# Altium PCB PCB1.PcbDoc
Units mm, origin at the board's own origin, x right, y up, seen from the top; angles counter-clockwise.
Board outline 85.6 x 53.98 mm, 2 copper layers (Top Layer, Bottom Layer); 37 components, 37 nets, 137 pads, 19 vias.
Unrouted connection lines stored in the file: 14.
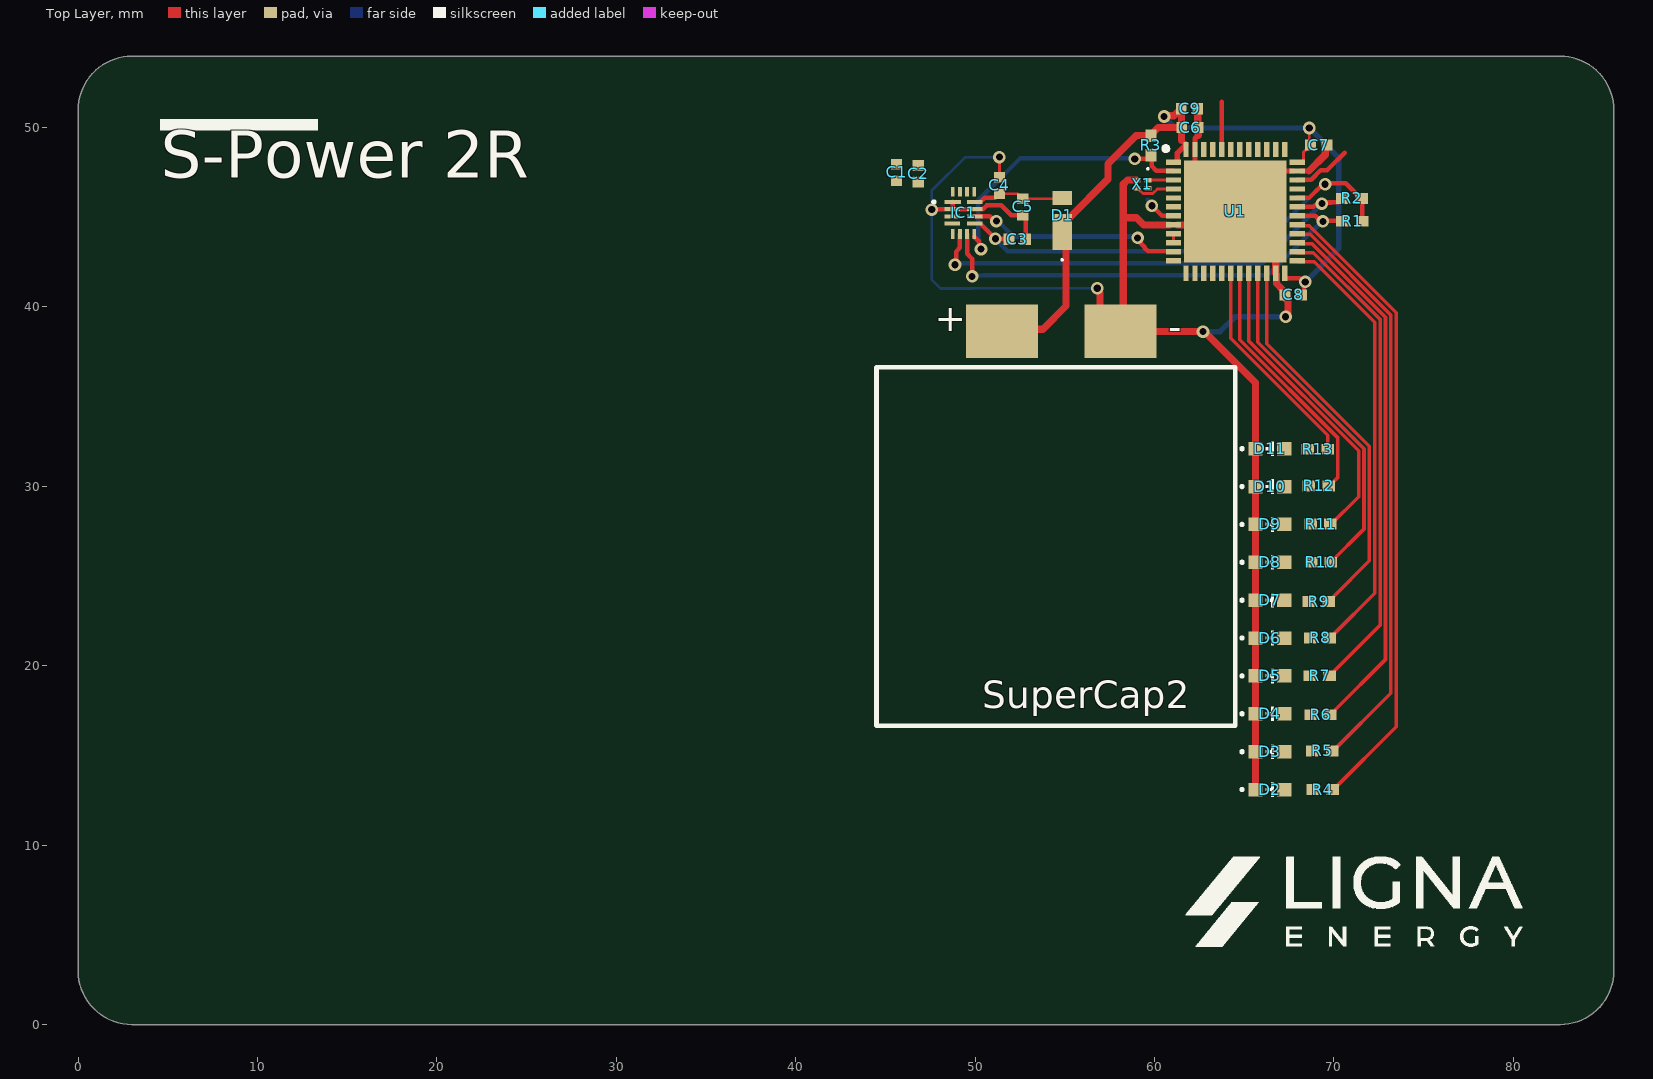
[diagram p0: Top Layer view]
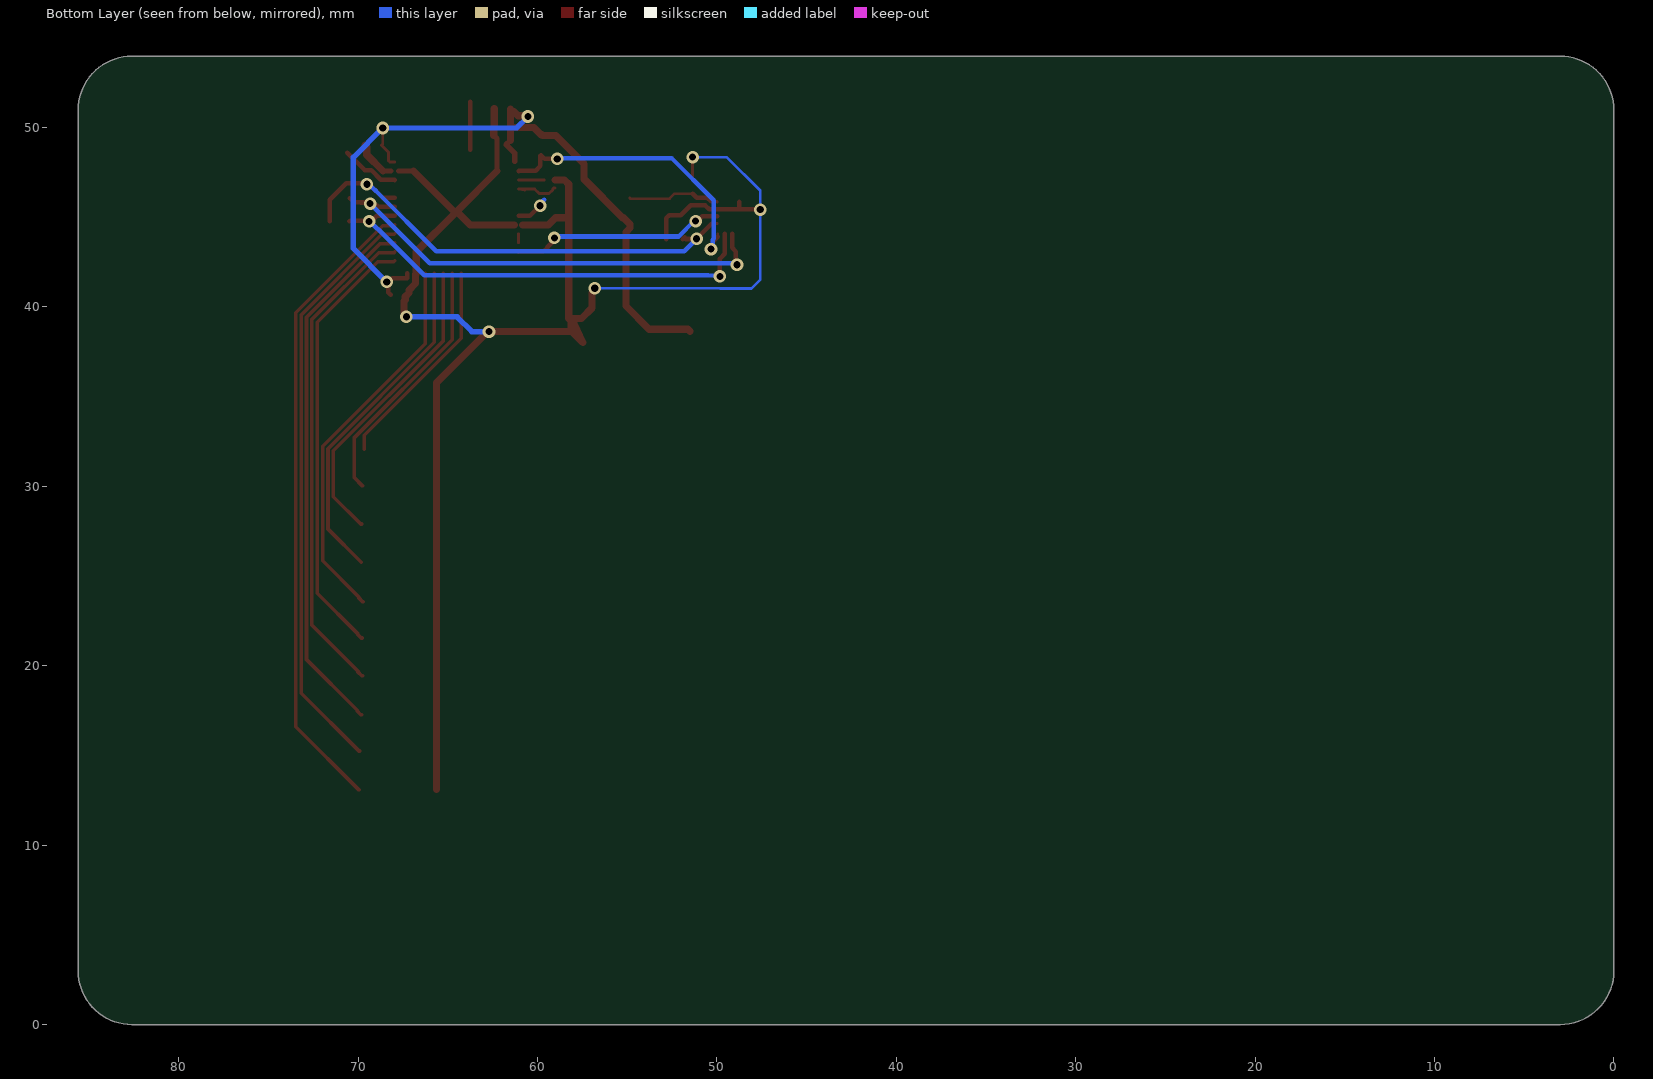
[diagram p1: Bottom Layer view, seen from below]

## Layer stack, top to bottom
Top Solder: solder mask 0.0102, Solder Resist, Dk 3.5
Top Layer: signal copper 0.0356
Dielectric 1: dielectric 0.32, FR-4, Dk 4.8
Bottom Layer: signal copper 0.0356
Bottom Solder: solder mask 0.0102, Solder Resist, Dk 3.5

## Board outline
0,3 0,50.98 cw(c3,50.98) 3,53.98 82.6,53.98 cw(c82.6,50.98) 85.6,50.98 85.6,3 cw(c82.6,3) 82.6,0 3,0 cw(c3,3)

## Design rules (kind name [scope] priority, off if disabled: settings)
Clearance [All] p1: gap=0.254 ignorepadtopadclearanceinfootprint=FALSE except(0: Arc-Hole Track-Hole SMDPad-Hole THPad-Hole Via-Hole Fill-Hole Poly-Hole Region-Hole Text-Hole; 0.1: Arc-Arc Arc-Track Arc-SMDPad Track-Track Track-SMDPad)
PolygonConnect [All] p1: connectstyle=Relief reliefconductorwidth=0.254 reliefentries=4 polygonreliefangle="90 Angle" airgapwidth=0.254
RoutingVias [All] p1: holewidth=0.711 width=1.27 viastyle="Through Hole" minholewidth=0.4 minwidth=0.7 maxholewidth=0.711 maxwidth=1.27
SolderMaskExpansion [All] p1: expansion=0.102 istentingtop=FALSE
Width [All] p1: maxlimit=0.4 minlimit=0.1 preferedwidth=0.254
30 further rules are at their usual default settings.

## Classes and differential pairs
component class Sheet1: C3 C4 C5 C6 C7 C8 C9 D1 D2 D3 D4 D5 D6 D7 D8 D9 D10 D11 IC1 R1 R2 R3 R4 R5 R6 R7 R8 R9 R10 R11 R12 R13 SuperCap2 U1 X1

## Components (designator, comment, footprint, x,y, rotation, side; value= is the part's Value field where it differs from the comment)
C1 "GRM155C81C474KE01D" CAPC1005X70N 45.625,47.5 r90 top value=0F
C2 "GRM155C81C474KE01D" CAPC1005X70N 46.825,47.425 r90 top value=0F
C3 "GRM155R61E105KA12D" CAPC1005X55N 52.35,43.775 r0 top value=1µF
C4 "C0402C101KCGACAUTO" CAPC1005X70N 51.35,46.775 r270 top
C5 "C0402C101KCMBASJ105SB7474KFNA01GACAUTO" CAPC1005X70N 52.65,45.575 r90 top
C6 "C0402C475K8PACTU" CAPC1005X70N 61.975,50 r0 top
C7 "MLAST105SB5104KFNA01" CAPC1005X70N 69.15,49.025 r0 top
C8 "MLAST105SB5104KFNA01" CAPC1005X70N 67.725,40.675 r180 top
C9 "MLAST105SB5104KFNA01" CAPC1005X70N 61.95,51.05 r0 top
D1 "RBE01VYM6AFHTR" RBE01VYM6AFHTR 54.85,44.825 r0 top
D2 "150060RS55040" WL-SMCD_0603 1336.425,1283.1 r0 top
D3 "150060RS55040" WL-SMCD_0603 1336.425,1285.211 r0 top
D4 "150060AS55040" WL-SMCD_0603 1336.425,1287.322 r0 top
D5 "150060AS55040" WL-SMCD_0603 1336.425,1289.433 r0 top
D6 "150060AS55040" WL-SMCD_0603 1336.425,1291.544 r0 top
D7 "150060VS55040" WL-SMCD_0603 1336.425,1293.656 r0 top
D8 "150060VS55040" WL-SMCD_0603 1336.425,1295.767 r0 top
D9 "150060VS55040" WL-SMCD_0603 1336.425,1297.878 r0 top
D10 "150060VS55040" WL-SMCD_0603 1336.425,1299.989 r0 top
D11 "150060BS55040" WL-SMCD_0603 1336.425,1302.1 r0 top
IC1 "NTP53321G0JHKZ" NTP53321G0JHKZ 49.35,45.25 r0 top
R1 "CRCW04024K70FKEDHP" RESC1005X40N 71.025,44.775 r0 top
R2 "CRCW04024K70FKEDHP" RESC1005X40N 71,46.05 r0 top
R3 "CRCW04024K70FKEDHP" RESC1005X40N 59.8,49 r90 top
R4 "SFR01MZPJ470" RESC1005X40N 69.375,13.1 r0 top
R5 "SFR01MZPJ470" RESC1005X40N 69.35,15.25 r0 top
R6 "SFR01MZPJ470" RESC1005X40N 69.25,17.275 r180 top
R7 "SFR01MZPJ470" RESC1005X40N 69.2,19.45 r180 top
R8 "SFR01MZPJ470" RESC1005X40N 69.225,21.55 r180 top
R9 "SFR01MZPJ470" RESC1005X40N 69.15,23.575 r180 top
R10 "SFR01MZPJ470" RESC1005X40N 69.275,25.775 r180 top
R11 "SFR01MZPJ470" RESC1005X40N 69.25,27.9 r180 top
R12 "SFR01MZPJ470" RESC1005X40N 69.15,30.025 r180 top
R13 "SFR01MZPJ470" RESC1005X40N 69.1,32.075 r180 top
SuperCap2 "S-Power 2R" "S-Power 2R" 54.5,36.65 r0 top
U1 "STM32L431CCU6" QFN50P700X700X60-49N-D 64.5,45.325 r0 top
X1 "WMRAG32K76CS2C00R0" WMRAG32K76CS2C00R0 59.325,46.85 r180 top

## Footprints (in the part's own frame and the unit in brackets; to place one, negate y for a bottom-side part, rotate by r counter-clockwise, add the part's x,y. Pads: shape width x height; smd on the part's side, far side on the other; paste and mask are expansions set on the pad)
CAPC1005X55N [mm]
  rect 0.6x0.62 smd: 1(-0.46,0) 2(0.46,0)
  body extent -0.5,-0.25 0.5,0.25, height 0.25
CAPC1005X70N [mm]
  rect 0.6x0.62 smd: 1(-0.46,0) 2(0.46,0)
  body extent -0.5,-0.25 0.5,0.25, height 0.5
NTP53321G0JHKZ [mm]
  rect 0.9x0.22 smd: 1(-0.6,0.6)
  rect 0.85x0.22 smd: 2(-0.625,0.2) 3(-0.625,-0.2) 4(-0.625,-0.6) 9(0.625,-0.6) 10(0.625,-0.2) 11(0.625,0.2) 12(0.625,0.6)
  rect 0.22x0.55 smd: 5(-0.6,-1.175) 6(-0.2,-1.175) 7(0.2,-1.175) 8(0.6,-1.175) 13(0.6,1.175) 14(0.2,1.175) 15(-0.2,1.175) 16(-0.6,1.175)
  silkscreen extent -1.7,0.55 -1.6,0.65, body extent -0.9,-1.3 0.9,1.3, height 0.6
QFN50P700X700X60-49N-D [mm]
  rect 0.85x0.3 smd: 1(-3.45,2.75) 2(-3.45,2.25) 3(-3.45,1.75) 4(-3.45,1.25) 5(-3.45,0.75) 6(-3.45,0.25) 7(-3.45,-0.25) 8(-3.45,-0.75) 9(-3.45,-1.25) 10(-3.45,-1.75) 11(-3.45,-2.25) 12(-3.45,-2.75) 25(3.45,-2.75) 26(3.45,-2.25) 27(3.45,-1.75) 28(3.45,-1.25) 29(3.45,-0.75) 30(3.45,-0.25) 31(3.45,0.25) 32(3.45,0.75) 33(3.45,1.25) 34(3.45,1.75) 35(3.45,2.25) 36(3.45,2.75)
  rect 0.3x0.85 smd: 13(-2.75,-3.45) 14(-2.25,-3.45) 15(-1.75,-3.45) 16(-1.25,-3.45) 17(-0.75,-3.45) 18(-0.25,-3.45) 19(0.25,-3.45) 20(0.75,-3.45) 21(1.25,-3.45) 22(1.75,-3.45) 23(2.25,-3.45) 24(2.75,-3.45) 37(2.75,3.45) 38(2.25,3.45) 39(1.75,3.45) 40(1.25,3.45) 41(0.75,3.45) 42(0.25,3.45) 43(-0.25,3.45) 44(-0.75,3.45) 45(-1.25,3.45) 46(-1.75,3.45) 47(-2.25,3.45) 48(-2.75,3.45)
  rect 5.7x5.7 smd: 49(0,0)
  silkscreen extent -4,3.38 -3.75,3.62, body extent -3.55,-3.55 3.55,3.55, height 0.6
RBE01VYM6AFHTR [mm]
  rect 1.1x2 smd: 1(0,-0.65)
  rect 1.1x0.8 smd: 2(0,1.25)
  silkscreen extent -0.05,-2.25 0.05,-2.15, body extent -0.7,-1.25 0.7,1.25, height 0.8
RESC1005X40N [mm]
  rect 0.7x0.6 smd: 1(-0.55,0) 2(0.55,0)
  body extent -0.5,-0.25 0.5,0.25, height 0.4
"S-Power 2R" [mm]
  rect 4x3 smd: 1(-3,2) 2(3.6,2)
  silkscreen extent -10,-20 10,0
WL-SMCD_0603 [mm] "SMD Mono-color Chip LED, body 1.6x0.8mm"
  rect 0.8x0.75 smd: 1(-1270.8,-1270) 2(-1269.2,-1270)
  silkscreen extent -1271.62,-1270.4 -1269.78,-1269.6, body extent -1270.8,-1270.4 -1269.2,-1269.6, height 0.42
WMRAG32K76CS2C00R0 [mm]
  rect 0.4x0.25 smd: 1(-0.3,-0.225) 2(0.3,-0.225) 3(0.3,0.225) 4(-0.3,0.225)
  silkscreen extent -0.35,-0.9 -0.25,-0.8, body extent -0.48,-0.33 0.48,0.33, height 0.45

## Part data
C1 C2: library part CMP-001-00140-1, "Multilayer Ceramic Capacitors MLCC - SMD/SMT", Manufacturer_Name="Murata Electronics", Mouser Part Number=81-GRM155C81C474KE1D, Datasheet Link=https://search.murata.co.jp/Ceramy/image/img/A01X/G101/ENG/GRM155C81C474KE01-01A.pdf, Design Item ID=GRM155C81C474KE01D, Height=0.7mm, Manufacturer_Part_Number=GRM155C81C474KE01D, Mouser Price/Stock=https://www.mouser.com/Search/Refine.aspx?Keyword=81-GRM155C81C474KE1D, Source=SamacSys.SchLib
C3: library part CMP-001-00126-1, "Capacitor", Manufacturer_Name="Murata Electronics", Mouser Part Number=81-GRM155R61E105KA2D, Rated Voltage="25 VDC", Arrow Part Number=GRM155R61E105KA12D, Arrow Price/Stock=https://www.arrow.com/en/products/grm155r61e105ka12d/murata-manufacturing?region=nac, Datasheet Link=https://search.murata.co.jp/Ceramy/image/img/A01X/G101/ENG/GRM155R61E105KA12-01A.pdf, Design Item ID=GRM155R61E105KA12D, Height=0.55mm, Manufacturer_Part_Number=GRM155R61E105KA12D, Mouser Price/Stock=https://www.mouser.co.uk/ProductDetail/Murata-Electronics/GRM155R61E105KA12D?qs=hiffU4J9V6bE4a81t2Mv5A%3D%3D, Source=SamacSys.SchLib
C4: library part "Generic capacitor", "Multilayer Ceramic Capacitors MLCC - SMD/SMT 500V 0.0001uF C0G 0402 10% AEC-Q200", Capacitance=100pF, ComponentLink1Description="New link", ComponentLink1URL=https://www.mouser.se/ProductDetail/KEMET/C0402C101KCGACAUTO?qs=1Kr7Jg1SGW8kQysZZQPmCw%3D%3D
C5: library part "Generic capacitor", "Multilayer Ceramic Capacitors MLCC - SMD/SMT 500V 0.0001uF C0G 0402 10% AEC-Q200", Capacitance=0.47uF, ComponentLink1Description="New link", ComponentLink1URL=https://www.mouser.se/ProductDetail/TAIYO-YUDEN/MBASJ105SB7474KFNA01?qs=tlsG%2FOw5FFh70%252Bw5vm%252Bxgg%3D%3D
C6: library part "Generic capacitor", "Multilayer Ceramic Capacitors MLCC - SMD/SMT", Capacitance=4.7uF, ComponentLink1Description="New link", ComponentLink1URL=https://www.mouser.se/ProductDetail/TAIYO-YUDEN/MLASJ105BB5475MFNA01?qs=sGAEpiMZZMsh%252B1woXyUXj3XUfju0vRpjpyIV14TsoXE%3D
C7 C8 C9: library part "Generic capacitor", "Multilayer Ceramic Capacitors MLCC - SMD/SMT 25V 0.1uF X5R 0402 10% Medical", Capacitance=100nF, ComponentLink1Description="New link", ComponentLink1URL=https://www.mouser.se/ProductDetail/TAIYO-YUDEN/MLAST105SB5104KFNA01?qs=sGAEpiMZZMsh%252B1woXyUXj3XUfju0vRpjIEu19pL458I%3D
D1: library part CMP-004-00062-1, "DIODE SCHOTTKY 6V 100MA TUMD2M", Manufacturer_Name="ROHM Semiconductor", Mouser Part Number=755-RBE01VYM6AFHTR, Datasheet Link=https://www.digikey.ph/en/products/detail/rohm-semiconductor/RBE01VYM6AFHTR/24634517, Design Item ID=RBE01VYM6AFHTR, Height=0.8mm, Manufacturer_Part_Number=RBE01VYM6AFHTR, Mouser Price/Stock=https://www.mouser.co.uk/ProductDetail/ROHM-Semiconductor/RBE01VYM6AFHTR?qs=VVKQmw408U8czvswzPLZtQ%3D%3D, Source=SamacSys.SchLib
D2 D3: library part CMP-207942-000007-3, "LED RED DIFFUSED 0603 SMD", Case/Package=0603, Color=Red, Forward Current=40mA, Forward Voltage=2V, Max Junction Temperature (Tj)=115°C, Max Operating Temperature=85°C, Max Reverse Voltage (DC)=5V, Min Operating Temperature=-40°C, Power Dissipation=48mW, Dominant Wavelength=624nm, Height=400µm, Length=1.6mm, Luminous Intensity=90mcd, NexarPartId=90235565, Packaging="Tape and Reel", Peak Wavelength=632nm, Reverse Voltage=5V, RoHS=Compliant, Viewing Angle=140°, Wavelength=624nm, Width=800µm
D4 D5 D6: library part CMP-03913-134708025-1, "150060AS55040 WL-SMCD SMT Mono-color Chip LED Diffused", Forward Current=40mA, Forward Voltage=2V, Max Operating Temperature=85°C, Max Reverse Voltage (DC)=5V, Min Operating Temperature=-40°C, Dominant Wavelength=605nm, Luminous Intensity=110mcd, NexarPartId=134708025, Peak Wavelength=609nm, Viewing Angle=140°
D7 D8 D9 D10: library part CMP-03913-90235568-2, "150060VS55040 WL-SMCD SMT Mono-color Chip LED Diffused", Case/Package=0603, Color=Green, Forward Current=40mA, Forward Voltage=2V, Max Junction Temperature (Tj)=115°C, Max Operating Temperature=85°C, Max Reverse Voltage (DC)=5V, Min Operating Temperature=-40°C, Power Dissipation=48mW, Dominant Wavelength=573nm, Height=400µm, Length=1.6mm, Luminous Intensity=60mcd, NexarPartId=90235568, Packaging="Tape and Reel", Peak Wavelength=575nm, Reverse Voltage=5V, RoHS=Compliant, Viewing Angle=140°, Wavelength=573nm, Width=800µm
D11: library part CMP-03913-90235561-2, "150060BS55040 WL-SMCD SMT Mono-color Chip LED Diffused", Forward Current=60mA, Forward Voltage=3.2V, Max Operating Temperature=85°C, Max Reverse Voltage (DC)=5V, Min Operating Temperature=-40°C, Dominant Wavelength=470nm, Height=400µm, Length=1.6mm, Luminous Intensity=80mcd, NexarPartId=90235561, Packaging="Tape and Reel", Peak Wavelength=465nm, RoHS=Compliant, Viewing Angle=140°, Wavelength=470nm, Width=800µm
IC1: library part CMP-031-00011-1, "Interface - Specialized NTAG", Manufacturer_Name=NXP, Mouser Part Number=771-NTP53321G0JHKZ, Arrow Part Number=NTP53321G0JHKZ, Arrow Price/Stock=https://www.arrow.com/en/products/ntp53321g0jhkz/nxp-semiconductors?region=nac, Datasheet Link=https://www.nxp.com/docs/en/data-sheet/NTP53x2.pdf, Design Item ID=NTP53321G0JHKZ, Height=0.5mm, Manufacturer_Part_Number=NTP53321G0JHKZ, Mouser Price/Stock=https://www.mouser.co.uk/ProductDetail/NXP-Semiconductors/NTP53321G0JHKZ?qs=u16ybLDytRYy2Rt%2Fib73Dw%3D%3D, Source=SamacSys.SchLib
R1 R2 R3: library part CMP-009-00230-1, "CRCW Power Resistor 0402 0.063W 4K7 Vishay CRCW Series Thick Film Power Resistor 0402 Case 4.7k +/-1% 0.125W +/-100ppm/K", Manufacturer_Name=Vishay, Mouser Part Number=71-CRCW04024K70FKEDH, Resistance=4.7k, Arrow Part Number=CRCW04024K70FKEDHP, Arrow Price/Stock=https://www.arrow.com/en/products/crcw04024k70fkedhp/vishay?utm_currency=USD&region=nac, Datasheet Link=http://www.vishay.com/docs/20035/dcrcwe3.pdf, Design Item ID=CRCW04024K70FKEDHP, Height=0.4mm, Manufacturer_Part_Number=CRCW04024K70FKEDHP, Mouser Price/Stock=https://www.mouser.co.uk/ProductDetail/Vishay-Dale/CRCW04024K70FKEDHP?qs=k2%2FDWSARqgH3ASlI4vM3KQ%3D%3D, Source=SamacSys.SchLib
R4 R5 R6 R7 R8 R9 R10 R11 R12 R13: library part "Generic resistor", "Thick Film Resistors Sulfur Tolerant Chip Resistors 0402 case size", Resistance=47, ComponentLink1Description="New link", ComponentLink1URL=https://www.mouser.se/ProductDetail/ROHM-Semiconductor/SFR01MZPJ470?qs=sGAEpiMZZMvdGkrng054t2cqbZCzJY7NKh3gUwXOa5kuN5TNJ%252Bi2TA%3D%3D
SuperCap2: library part CMP-111-000001-1, Design Item ID="S-Power 2R", Source=Schlib.SchLib
U1: library part CMP-031-00018-1, "ARM Microcontrollers - MCU 16/32-BITS MICROS", Manufacturer_Name=STMicroelectronics, Mouser Part Number=511-STM32L431CCU6, Arrow Part Number=STM32L431CCU6, Arrow Price/Stock=https://www.arrow.com/en/products/stm32l431ccu6/stmicroelectronics?region=nac, Datasheet Link=http://www.st.com/content/ccc/resource/technical/document/datasheet/group3/83/b3/60/f6/b1/cc/47/7e/DM00257211/files/DM00257211.pdf/jcr:content/translations/en.DM00257211.pdf, Design Item ID=STM32L431CCU6, Height=0.6mm, Manufacturer_Part_Number=STM32L431CCU6, Mouser Price/Stock=https://www.mouser.co.uk/ProductDetail/STMicroelectronics/STM32L431CCU6?qs=U58vgkJzipRWiXTJcDrRbg%3D%3D, Source=SamacSys.SchLib
X1: library part CMP-003-00031-1, "32.768 kHz +/-20ppm Crystal 8pF 75 kOhms 4-SMD", Manufacturer_Name="Murata Electronics", Mouser Part Number=81-WMRAG32K76CS2C00R, Datasheet Link=https://www.murata.com/products/productdata/8804604674078/SPEC-WMRAG32K76CS2C00R0.pdf, Design Item ID=WMRAG32K76CS2C00R0, Height=0.35mm, Manufacturer_Part_Number=WMRAG32K76CS2C00R0, Mouser Price/Stock=https://www.mouser.co.uk/ProductDetail/Murata-Electronics/WMRAG32K76CS2C00R0?qs=bZr6mbWTK5kWV2uyypDEfg%3D%3D, Source=SamacSys.SchLib

## Via types
v1: diameter 0.7, hole 0.4, Top Layer to Bottom Layer, tented both sides, 19 vias

## Nets (pads, with @x,y where several pads share a name; then routed paths per layer and width w, separated by ;. In a path a pad name is that pad's centre, name@x,y a point inside that pad or via, vN(x,y) a via of type N, cw(c..) or ccw(c..) an arc to the next point about the centre after c; other vN are vias at no path point)
A_en: U1.9 U1.10 | length 0.5
  Top Layer w0.154: U1.10 U1.9
ANT+: C1.2 C2.2 IC1.14
ANT-: C1.1 C2.1 IC1.15
BOOT0: U1.44 | length 2.7
  Top Layer w0.254: U1.44 63.75,51.45
D0: R4.2 U1.29 | length 35.6
  Top Layer w0.2: U1.29 68,44.525 68.624,44.525 73.472,39.677 73.472,16.597 69.975,13.1 R4.2
D1: R5.2 U1.28 | length 32.8
  Top Layer w0.2: U1.28 67.976,44.049 68.675,44.049 73.172,39.552 73.172,18.472 69.95,15.25 R5.2
D2: R6.1 U1.27 | length 30.1
  Top Layer w0.2: U1.27 68,43.525 68.775,43.525 72.872,39.428 72.872,20.347 70.05,17.525 70.05,17.475 69.85,17.275 R6.1
D3: R7.1 U1.26 | length 27.2
  Top Layer w0.2: U1.26 67.997,43.028 68.847,43.028 72.572,39.303 72.572,22.272 70,19.7 70,19.65 69.8,19.45 R7.1
D4: R8.1 U1.25 | length 24.4
  Top Layer w0.2: U1.25 68,42.525 68.9,42.525 72.272,39.153 72.272,24.047 70.025,21.8 70.025,21.75 69.825,21.55 R8.1
D5: R9.1 U1.22 | length 21.6
  Top Layer w0.2: U1.22 66.25,37.95 71.972,32.228 71.972,25.847 69.95,23.825 69.95,23.775 69.75,23.575 R9.1
D6: R10.1 U1.21 | length 19.3
  Top Layer w0.2: U1.21 65.75,38.026 71.672,32.104 71.672,27.622 R10.1
D7: R11.1 U1.20 | length 17.2
  Top Layer w0.2: U1.20 65.25,38.101 71.372,31.979 71.372,29.422 69.85,27.9 R11.1
D8: R12.1 U1.19 | length 14.3
  Top Layer w0.2: U1.19 64.75,38.177 70.2,32.727 70.2,30.475 R12.1@69.75,30.025
D9: R13.1 U1.18 | length 12
  Top Layer w0.2: U1.18 64.25,38.25 69.65,32.85 R13.1
ED: IC1.8 R3.1 U1.2 | length 16.4
  Top Layer w0.154: IC1.8@49.95,43.91 IC1.8 ; v1@50.221,43.329 v1(50.325,43.225)
  Top Layer w0.254: IC1.8@49.95,43.91 50.221,43.639 v1@50.221,43.329 ; v1(58.895,48.253) 59.603,48.253 R3.1 59.832,48.418 59.832,47.868 60.102,47.598 61.027,47.598 U1.2
  Bottom Layer w0.254: v1(50.325,43.225) 50.221,43.329 50.221,43.741 50.169,43.793 50.169,45.944 52.525,48.3 58.849,48.3 v1(58.895,48.253)
EH: C4.2 C5.2 D1.2 IC1.12 | length 5.2
  Top Layer w0.154: IC1.12 50.008,45.883 IC1.12@50.323,45.883 ; C4.2 52.36,46.315 52.64,46.035 C5.2 54.81,46.035 D1.2
  Top Layer w0.254: IC1.12@50.323,45.883 50.532,46.092 51.127,46.092 C4.2
GND: C3.2 C4.1 C5.1 C6.2 C7.2 C8.2 C9.2 D2.1 D3.1 D4.1 D5.1 D6.1 D7.1 D8.1 D9.1 D10.1 D11.1 IC1.1 IC1.2 IC1.11 SuperCap2.2 U1.8 U1.23 U1.35 U1.47 U1.49 X1.2 | length 104.7
  Top Layer w0.154: C4.1 v1(51.35,48.35)
  Top Layer w0.254: v1(47.575,45.425) 47.588,45.438 48.713,45.438 IC1.2 ; IC1.1 48.75,45.475 IC1.2 ; C3.2 52.81,44.955 C5.1 52.019,45.115 51.459,45.675 50.656,45.675 50.431,45.45 IC1.11 IC1.2
  Top Layer w0.3: U1.49@62.25,47.575 62.25,49.38 62.435,49.565 ; U1.49@66.9,47.575 U1.35@67.725,47.575 ; U1.35@68.175,47.575 68.6,47.575
  Top Layer w0.4: v1(56.8,41.044) 56.8,40.963 56.95,40.813 56.95,39.95 57.55,39.35 58.1,39.35 57.468,38.018 SuperCap2.2 58.1,39.2 58.25,39.35 58.25,44.975 ; SuperCap2.2@58.11,38.66 SuperCap2.2@58.11,39.35 ; SuperCap2.2@58.125,38.625 58.25,38.625 v1(62.7,38.625) ; X1.2 58.484,47.075 58.25,46.84 58.25,44.975 ; U1.8@60.825,44.575 59.394,44.575 58.994,44.975 58.25,44.975 ; U1.8@61.275,44.575 63.75,44.575 U1.49 ; U1.49@62.25,47.575 U1.49 ; C6.2@62.41,49.975 C9.2 ; 62.435,49.565 C6.2 ; v1@62.775,38.625 65.625,35.775 D11.1 D10.1 D9.1 D8.1 D7.1 D6.1 D5.1 D4.1 D3.1 D2.1 ; U1.49@64.65,45.325 U1.49@66.9,47.575 ; v1(67.3,39.45) 67.3,39.531 67.433,39.664 67.433,40.331 67.365,40.398 67.365,40.575 67.165,40.775 67.165,40.935 66.8,41.3 66.8,41.825 U1.23 66.75,43.075 U1.49 ; 68.6,47.575 69.51,48.485 69.51,48.925 C7.2
  Bottom Layer w0.154: v1(51.35,48.35) 49.45,48.35 47.575,46.475 v1(47.575,45.425) 47.575,41.525 48.077,41.023 49.827,41.023 v1(56.8,41.044)
  Bottom Layer w0.3: v1(62.7,38.625) 63.651,38.625 64.476,39.45 v1(67.3,39.45)
HPD: IC1.10 U1.11 | length 12
  Top Layer w0.254: IC1.10 50.803,45.05 51.065,44.788 v1(51.186,44.788) ; v1(59.054,43.846) 59.054,43.726 59.458,43.322 59.458,43.278 59.637,43.098 61.027,43.098 U1.11
  Bottom Layer w0.254: v1(51.186,44.788) 51.271,44.788 52.132,43.927 58.973,43.927 v1(59.054,43.846)
JTCK-SWCLK: U1.37
JTMS-SWDIO: U1.34 | length 3.3
  Top Layer w0.254: U1.34 67.973,47.098 68.727,47.098 69.26,47.631 69.626,47.631 70.6,48.605
NetD2_2: D2.2 R4.1
NetD3_2: D3.2 R5.1
NetD4_2: D4.2 R6.2
NetD5_2: D5.2 R7.2
NetD6_2: D6.2 R8.2
NetD7_2: D7.2 R9.2
NetD8_2: D8.2 R10.2
NetD9_2: D9.2 R11.2
NetD10_2: D10.2 R12.2
NetD11_2: D11.2 R13.2
NetP_0: U1.7 | length 1.9
  Top Layer w0.254: v1(59.85,45.642) 60.417,45.075 U1.7
  Bottom Layer w0.254: 59.626,45.986 59.85,45.763 v1(59.85,45.642)
NFC_Vcc: C3.1 IC1.9 R1.2 R2.2 U1.32 | length 28.4
  Top Layer w0.154: IC1.9 IC1.9@50.29,44.65 ; v1@50.965,43.975 51.05,43.975 51.127,43.898 v1(51.127,43.798)
  Top Layer w0.254: IC1.9@50.29,44.65 v1@50.965,43.975 ; v1@51.05,43.975 51.127,43.898 v1(51.127,43.798) ; v1@51.135,43.807 51.156,43.787 51.717,43.787 51.785,43.855 51.785,43.89 C3.1@51.89,43.785 ; U1.32 67.973,46.098 68.632,46.098 69.025,46.491 69.033,46.491 69.386,46.844 v1(69.506,46.844) ; v1@69.434,46.9 70.65,46.9 71.575,45.975 R1.2
  Bottom Layer w0.254: v1(51.127,43.798) 51.81,43.115 65.65,43.115 69.025,46.491 69.033,46.491 69.386,46.844 v1(69.506,46.844)
SCL1: IC1.7 R1.1 U1.30 | length 26
  Top Layer w0.254: IC1.7 49.55,42.966 49.825,42.691 v1(49.825,41.704) ; U1.30 68.954,45.075 69.259,44.771 v1(69.379,44.771) ; v1@69.344,44.806 70.444,44.806 R1.1
  Bottom Layer w0.254: v1(49.825,41.704) 50.473,41.775 66.313,41.775 68.737,44.199 v1(69.379,44.771)
SDA1: IC1.6 R2.1 U1.31 | length 26.5
  Top Layer w0.254: v1(48.875,42.35) 48.933,42.408 48.933,43.081 49.15,43.298 IC1.6 ; U1.31 68.855,45.575 68.954,45.675 69.243,45.675 v1(69.328,45.76) ; v1@69.25,45.822 69.837,45.822 69.842,45.827 70.227,45.827 R2.1
  Bottom Layer w0.254: v1(48.875,42.35) 48.96,42.435 66.01,42.435 69.328,45.753 v1(69.328,45.76)
Vcap: C6.1 C7.1 C8.1 C9.1 D1.1 R3.2 SuperCap2.1 U1.1 U1.24 U1.36 U1.48 | length 45.4
  Top Layer w0.154: U1.36 68.225,48.075 68.298,48.148 68.298,48.623 68.69,49.015 C7.1 68.625,49.09 v1(68.625,49.975) ; C8.1 C8.1@68.185,40.685
  Top Layer w0.254: U1.24 67.25,41.613 67.273,41.59 68.089,41.59 68.279,41.4 v1(68.4,41.4) 68.315,41.315 68.315,40.805 C8.1
  Top Layer w0.3: U1.1@61.255,48.125 61.255,48.565 61.741,49.051 61.506,49.286
  Top Layer w0.4: SuperCap2.1 51.609,38.759 53.774,38.759 55.066,40.051 55.066,44.168 54.841,44.393 54.841,44.616 55.2,44.975 55.252,44.975 57.395,47.119 57.395,47.97 58.976,49.551 59.7,49.551 59.75,49.601 59.801,49.601 60.201,50.001 C6.1@61.514,50.001 ; v1(60.531,50.615) 60.576,50.66 61.09,50.66 C9.1@61.32,50.89 ; 61.506,49.286 C6.1@61.506,49.991 ; C6.1@61.506,50.009 C9.1@61.506,51.026
  Bottom Layer w0.3: v1(60.531,50.615) 60.531,50.602 61.158,49.975 v1(68.625,49.975) 70.26,48.34 70.26,43.26 v1(68.4,41.4)
XTAL32IN: U1.3 X1.1 | length 1.4
  Top Layer w0.154: X1.1 U1.3
XTAL32OUT: U1.4 X1.3 | length 2.6
  Top Layer w0.154: X1.3 59.1,46.625 59.148,46.577 59.148,46.527 59.352,46.323 59.901,46.323 60.153,46.575 U1.4 U1.4@60.702,46.502
pads on no net: IC1.3 IC1.4 IC1.5 IC1.13 IC1.16 U1.5 U1.6 U1.12 U1.13 U1.14 U1.15 U1.16 U1.17 U1.33 U1.38 U1.39 U1.40 U1.41 U1.42 U1.43 U1.45 U1.46 X1.4

## Silkscreen, mask and mechanical layers (free items; w line width, h text height)
Top Overlay:
  drawing of 14 lines, arcs and shapes, not listed
  text "S-Power 2R" at 4.6,46.327 h4.5
Mechanical 1:
  the board outline again, w0.254

## Text inside footprints (layer, text, board x,y; h text height)
SuperCap2: Top Overlay "+" at 47.754,38.65 h1.52; Top Overlay "-" at 60.754,38.142 h1.52